# Altium PCB PCB1.PcbDoc
Units mm, origin at the board's own origin, x right, y up, seen from the top; angles counter-clockwise.
Board outline 50.04 x 50.04 mm, 2 copper layers (Top Layer, Bottom Layer); 20 components, 16 nets, 55 pads, 0 vias.
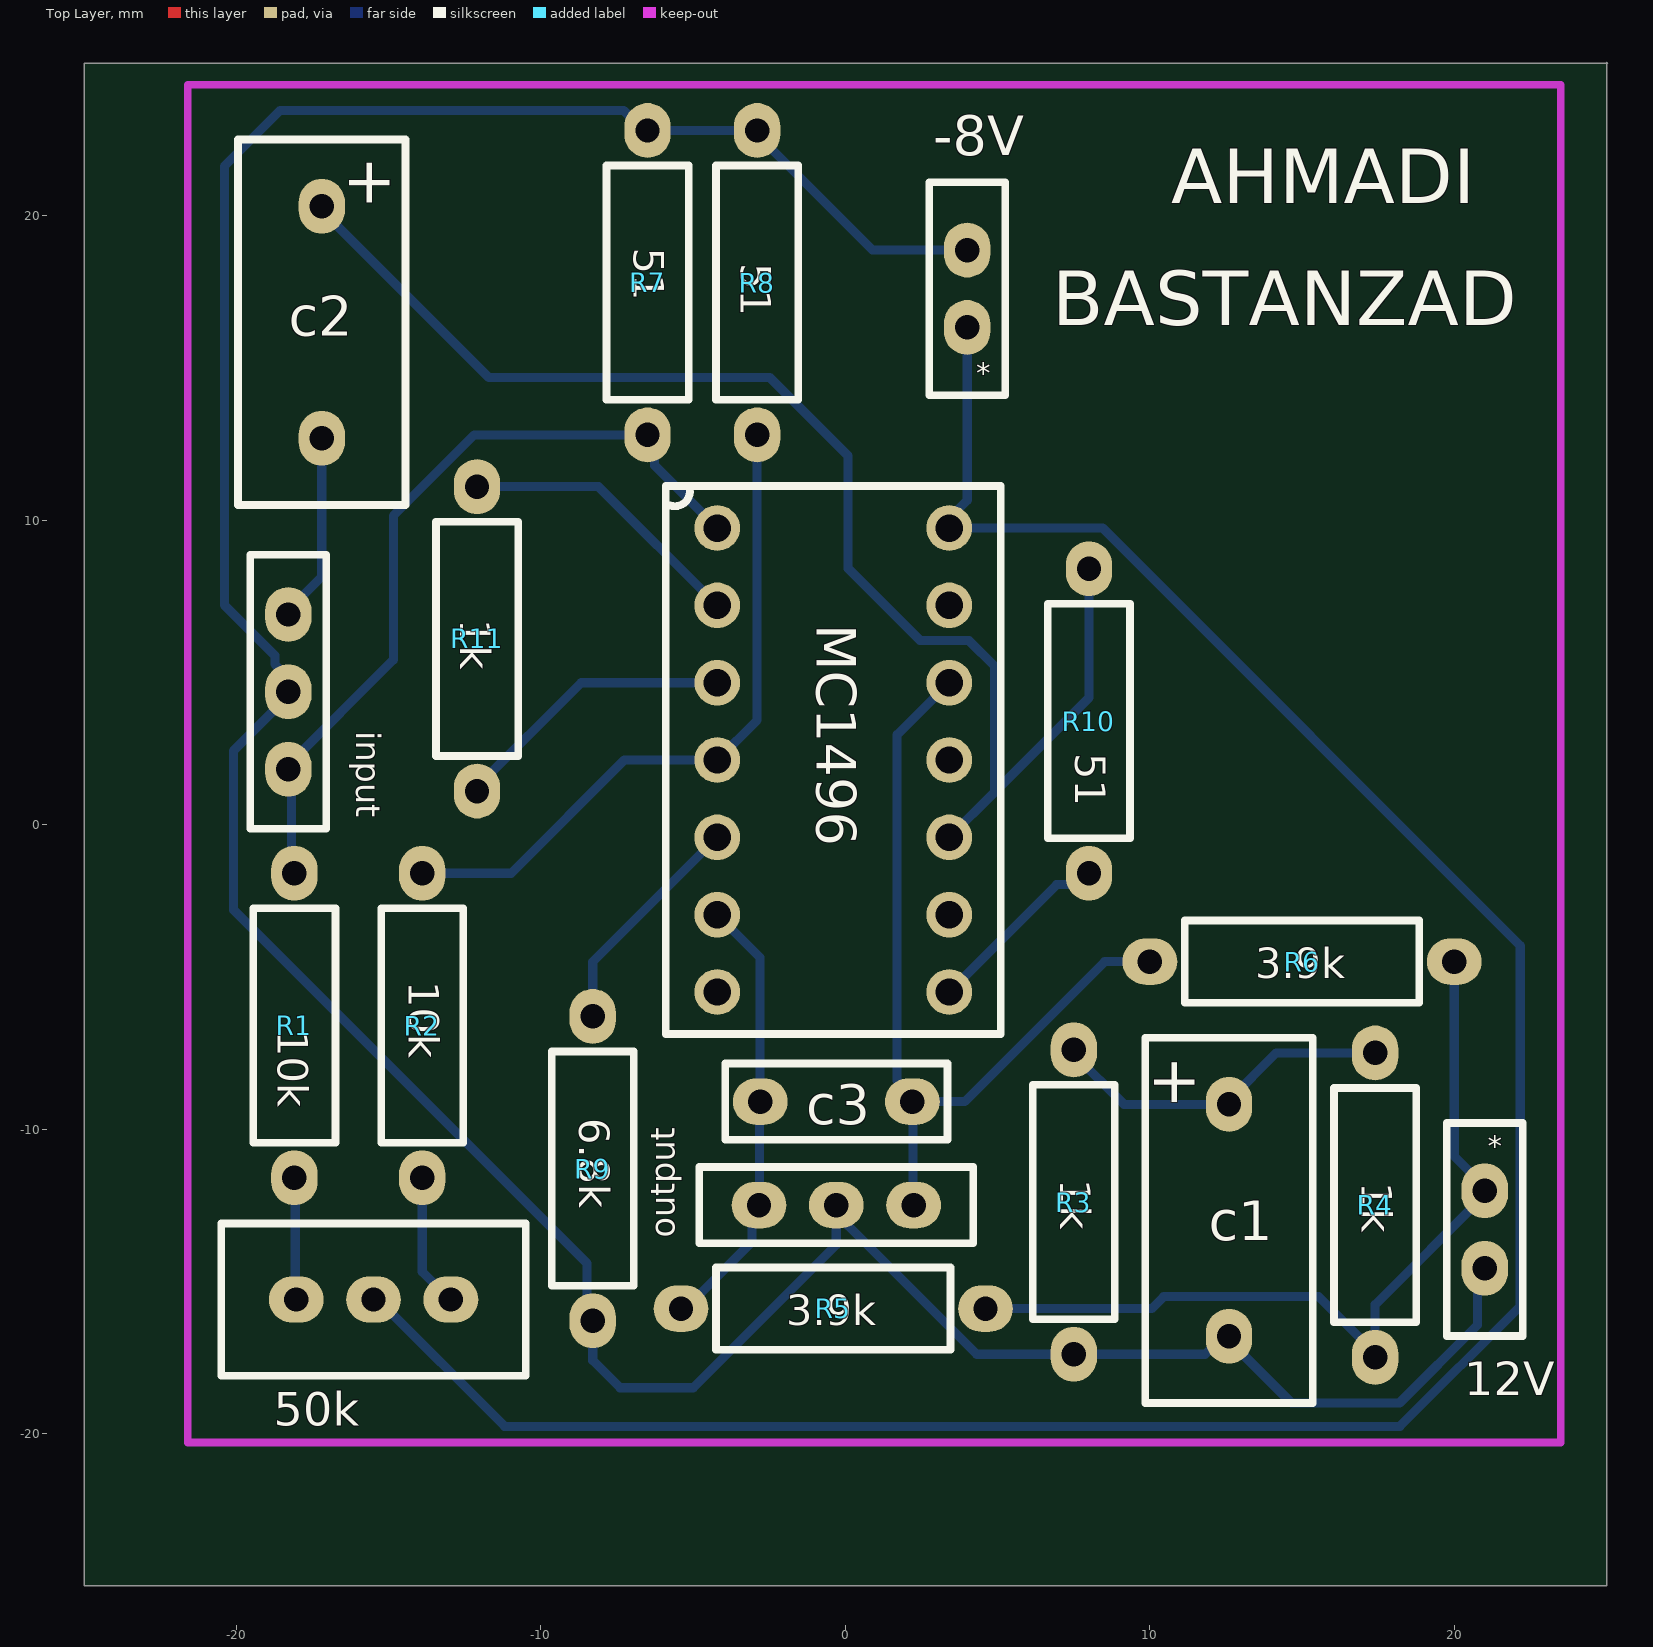
[diagram p0: Top Layer view]
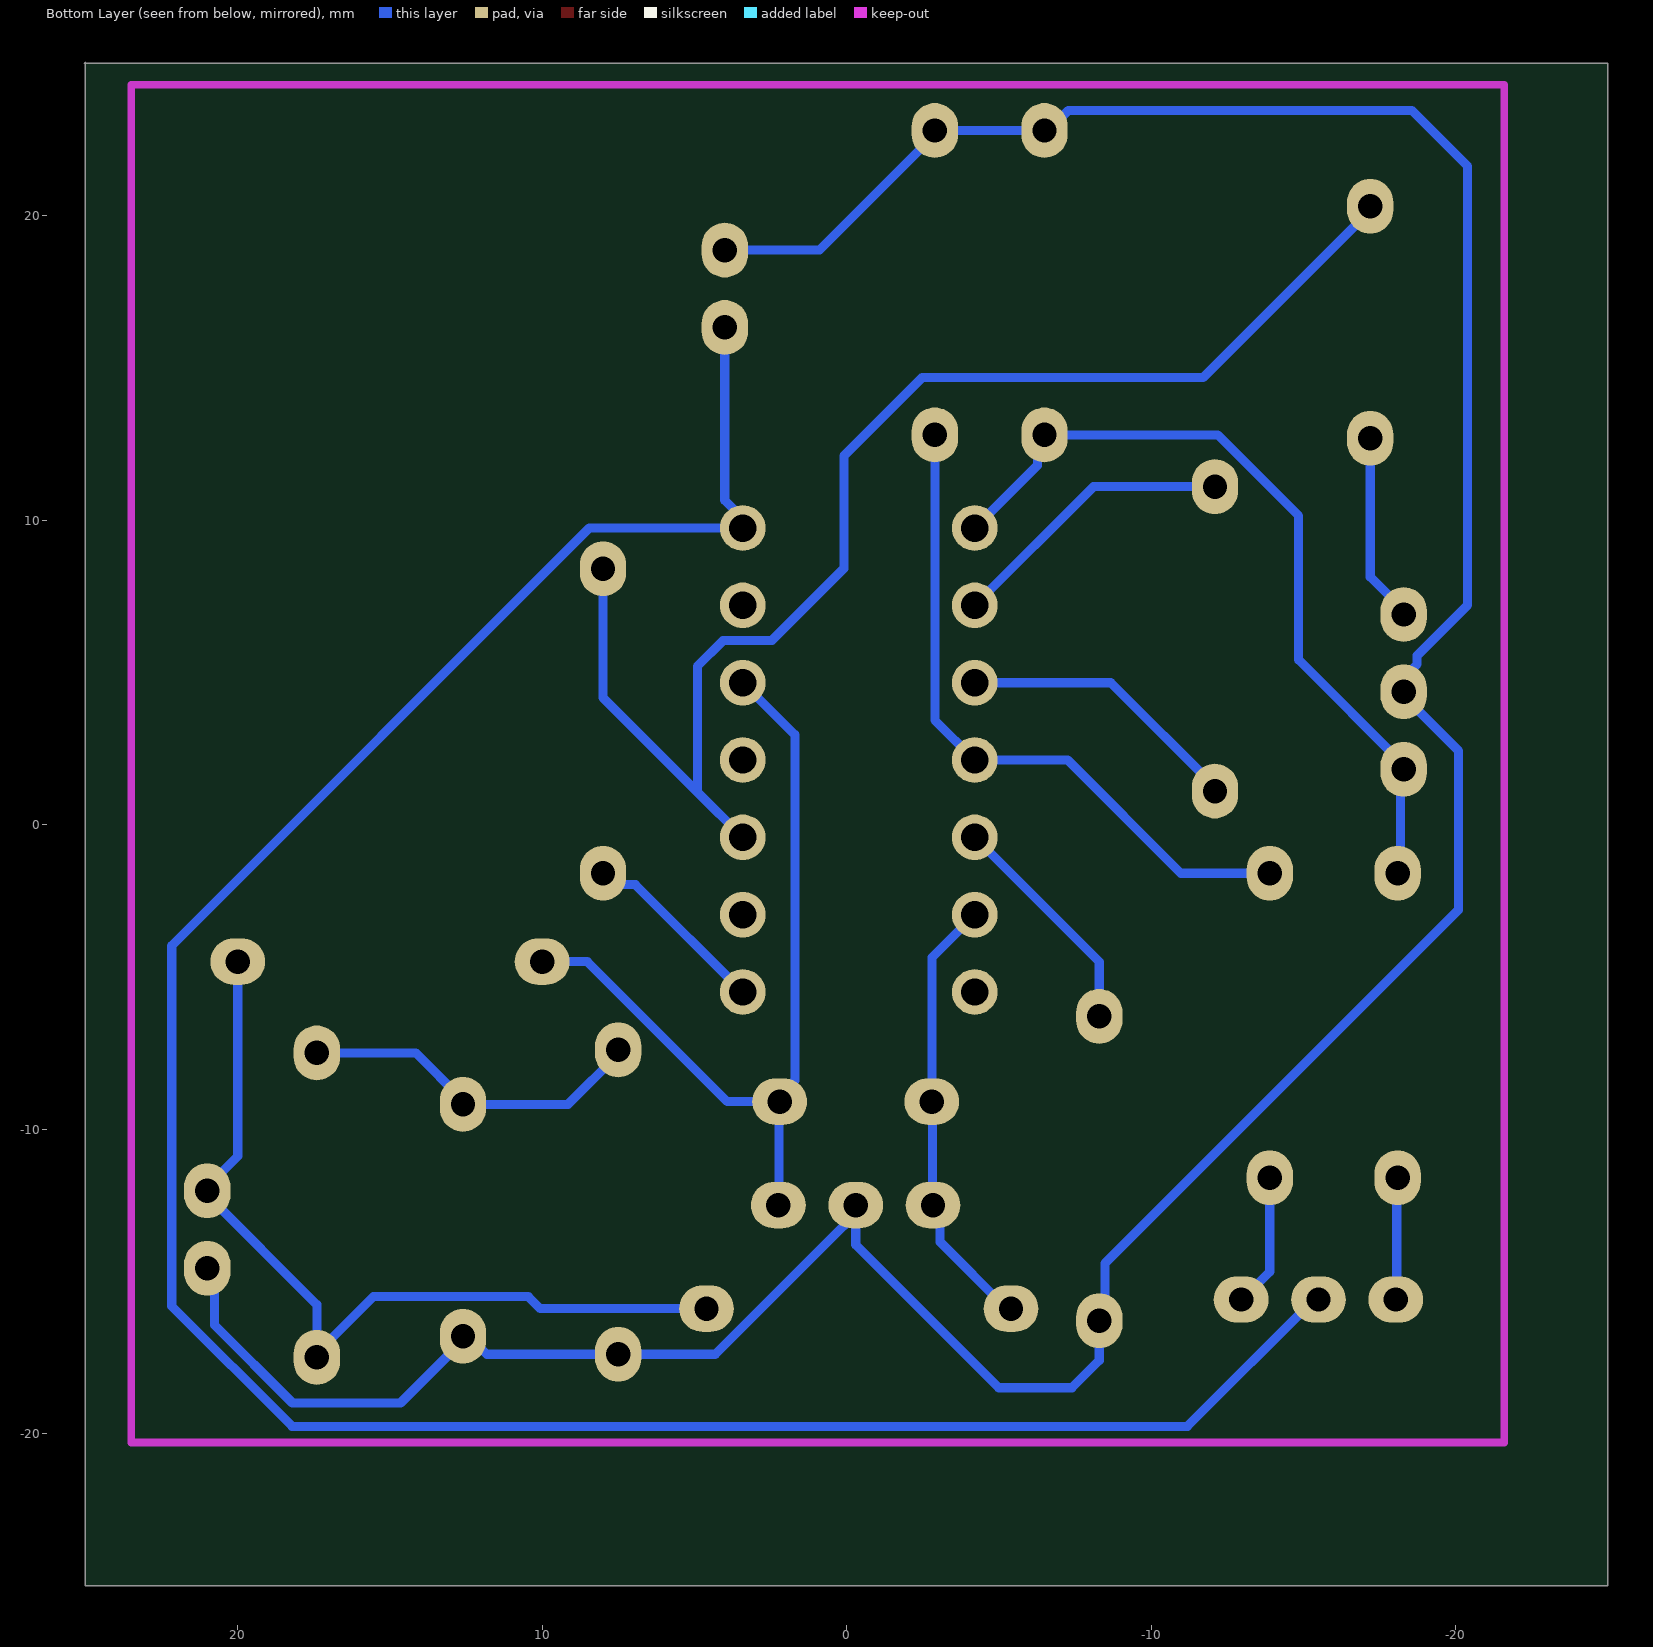
[diagram p1: Bottom Layer view, seen from below]

## Layer stack, top to bottom
Top Solder: solder mask 0.0102, Solder Resist, Dk 3.5
Top Layer: signal copper 0.0356
Dielectric 1: dielectric 0.32, FR-4, Dk 4.8
Bottom Layer: signal copper 0.0356
Bottom Solder: solder mask 0.0102, Solder Resist, Dk 3.5

## Board outline
-25,-25 -25,25 25.038,25 25,25.038 25,-25

## Design rules (kind name [scope] priority, off if disabled: settings)
Clearance [All] p1: gap=0.254 ignorepadtopadclearanceinfootprint=FALSE
PolygonConnect [All] p1: connectstyle=Relief reliefconductorwidth=0.254 reliefentries=4 polygonreliefangle="90 Angle" airgapwidth=0.254
RoutingVias [All] p1: holewidth=0.711 width=1.27 viastyle="Through Hole" minholewidth=0.711 minwidth=1.27 maxholewidth=0.711 maxwidth=1.27
SolderMaskExpansion [All] p1: expansion=0.102 istentingtop=FALSE
SupplyNets "Schematic Supply Nets" [InNet('GND')] p1: voltage=0.000
Width [All] p1: maxlimit=0.3 minlimit=0.254 preferedwidth=0.3 toplayer_maxwidth=0.254 toplayer_prefwidth=0.254 bottomlayer_minwidth=0.3 minimp=50.000000 maximp=50.000000 favimp=50.000000
30 further rules are at their usual default settings.

## Components (designator, comment, footprint, x,y, rotation, side; value= is the part's Value field where it differs from the comment)
12V "2x pin header" "2x pin header" 21,-13.3 r270 top
50k "3296 potenciometer" "3296 potenciometer" -15.5,-15.6 r0 top (schematic designator 50K)
-8V "2x pin header" "2x pin header" 4,17.6 r90 top
c1 "100n" "100n cap" 12.6,-13 r270 top
c2 "100n" "100n cap" -17.2,16.5 r270 top
c3 "100p" "100p capacitor" -0.3,-9.1 r180 top
input "3x pin header" "3x pin header" -18.3,4.36 r90 top
MC1496 "MC1496.PP" DIP-14-7.62mm -0.4,-5.5 r0 top (schematic designator U1)
output "3x pin header" "3x pin header" -0.3,-12.5 r0 top
R1 "10k" R_AXIAL_0.25W -18.1,-6.6 r270 top
R2 "10k" R_AXIAL_0.25W -13.9,-6.6 r270 top
R3 "1K" R_AXIAL_0.25W 7.5,-12.4 r90 top
R4 "1k" R_AXIAL_0.25W 17.4,-12.5 r270 top
R5 "3.9k" R_AXIAL_0.25W -0.4,-15.9 r0 top
R6 "3.9k" R_AXIAL_0.25W 15,-4.5 r0 top
R7 "51ohm" R_AXIAL_0.25W -6.5,17.8 r270 top
R8 "51ohm" R_AXIAL_0.25W -2.9,17.8 r270 top
R9 "6.8k" R_AXIAL_0.25W -8.3,-11.3 r90 top
R10 "51ohm" R_AXIAL_0.25W 8,3.4 r90 top
R11 "1k" R_AXIAL_0.25W -12.1,6.1 r270 top

## Footprints (in the part's own frame and the unit in brackets; to place one, negate y for a bottom-side part, rotate by r counter-clockwise, add the part's x,y. Pads: shape width x height; smd on the part's side, far side on the other; paste and mask are expansions set on the pad)
"2x pin header" [mm]
  oval 1.8x1.524 hole 0.8: 1(-1.27,0) 2(1.27,0)
  silkscreen extent -3.5,-1.25 3.5,1.25
"3x pin header" [mm]
  oval 1.8x1.524 hole 0.8: 1(-2.54,0) 2(0,0) 3(2.54,0)
  silkscreen extent -4.5,-1.25 4.5,1.25
"100n cap" [mm]
  oval 1.8x1.524 hole 0.8: 1(-3.81,0) 2(3.81,0)
  silkscreen extent -6,-2.75 6,2.75
"100p capacitor" [mm]
  oval 1.8x1.524 hole 0.8: 1(-2.5,0) 2(2.5,0)
  silkscreen extent -3.65,-1.25 3.65,1.25
"3296 potenciometer" [mm]
  oval 1.8x1.524 hole 0.8: 1(-2.54,0) 2(0,0) 3(2.54,0)
  silkscreen extent -5,-2.5 5,2.5
DIP-14-7.62mm [mm]
  round 1.5 hole 0.9: 1(-3.81,15.24) 2(-3.81,12.7) 3(-3.81,10.16) 4(-3.81,7.62) 5(-3.81,5.08) 6(-3.81,2.54) 7(-3.81,0) 8(3.81,0) 9(3.81,2.54) 10(3.81,5.08) 11(3.81,7.62) 12(3.81,10.16) 13(3.81,12.7) 14(3.81,15.24)
  silkscreen extent -5.5,-1.38 5.5,16.62
R_AXIAL_0.25W [mm]
  oval 1.8x1.524 hole 0.8: 1(-5,0) 2(5,0)
  silkscreen extent -3.85,-1.35 3.85,1.35

## Part data
c1 c2: library part "100n capacitor"
c3: library part "100p capacitor"
MC1496: library part MC1496.Dipp
R1 R2 R3 R4 R5 R6 R7 R8 R9 R10 R11: library part RESISTOR_Dipp

## Nets (pads, with @x,y where several pads share a name; then routed paths per layer and width w, separated by ;. In a path a pad name is that pad's centre, name@x,y a point inside that pad or via, vN(x,y) a via of type N, cw(c..) or ccw(c..) an arc to the next point about the centre after c; other vN are vias at no path point)
bias: MC1496.5 R9.2 | length 7.6
  Bottom Layer w0.3: R9.2 -8.3,-4.51 MC1496.5
carr-in: MC1496.8 R10.1 | length 6.2
  Bottom Layer w0.3: MC1496.8 6.938,-1.972 7.628,-1.972 R10.1
carr-ref: c2.1 MC1496.10 R10.2 | length 45.5
  Bottom Layer w0.3: c2.1 -17.2,20.172 -11.712,14.684 -2.484,14.684 0.083,12.117 0.083,8.417 2.454,6.046 4.054,6.046 4.9,5.2 4.9,1.07 ; MC1496.10 4.9,1.07 ; R10.2 8,4.17 4.9,1.07
ga1: MC1496.2 R11.1 | length 9.5
  Bottom Layer w0.3: R11.1 -8.11,11.1 MC1496.2
ga2: MC1496.3 R11.2 | length 9.4
  Bottom Layer w0.3: R11.2 -12.1,1.238 -8.678,4.66 MC1496.3
GND: 12V.2 -8V.2 c1.2 input.2 output.2 R3.1 R7.1 R8.1 R9.1 | length 111.7
  Bottom Layer w0.3: R9.1@-8.483,-16.117 -8.483,-14.417 -20.1,-2.8 -20.1,2.422 -18.3,4.222 -18.3,4.829 -18.742,5.271 -18.742,5.555 -20.4,7.213 -20.4,21.624 -18.566,23.458 -7.288,23.458 -6.629,22.8 R8.1 -2.9,22.662 0.892,18.87 -8V.2 ; R9.1 -8.3,-17.6 -7.4,-18.5 -5,-18.5 -0.3,-13.8 output.2 0.072,-12.872 0.072,-13.159 4.313,-17.4 R3.1 11.817,-17.4 12.407,-16.81 c1.2 12.6,-16.948 14.652,-19 18.2,-19 20.767,-16.433 20.767,-14.803 12V.2
in-a: input.1 MC1496.1 R1.1 R7.2 | length 26.7
  Bottom Layer w0.3: R1.1 -18.2,-1.5 -18.2,1.72 input.1 -18.3,1.958 -14.846,5.412 -14.846,10.141 -12.187,12.8 R7.2 -6.266,12.566 -6.266,11.796 MC1496.1
in-b: MC1496.4 R2.1 R8.2 | length 22.5
  Bottom Layer w0.3: R2.1 -10.981,-1.6 -7.261,2.12 MC1496.4 -2.9,3.43 R8.2
Net12V_1: 12V.1 R4.2 R5.2 R6.2 | length 28.8
  Bottom Layer w0.3: R5.2 10.061,-15.9 10.455,-15.506 15.544,-15.506 17.4,-17.362 R4.2 17.4,-15.768 21,-12.168 12V.1 21,-11.892 20,-10.892 R6.2
Net50k_1: 50k.1 R1.2 | length 4
  Bottom Layer w0.3: R1.2 -18.07,-11.63 -18.07,-15.57 50k.1
Net50k_3: 50k.3 R2.2 | length 4.4
  Bottom Layer w0.3: R2.2 -13.9,-14.688 -12.988,-15.6 50k.3
Netc1_1: c1.1 R3.2 R4.1 | length 11.5
  Bottom Layer w0.3: R3.2 7.5,-7.538 9.152,-9.19 c1.1 12.6,-9.052 14.152,-7.5 R4.1
Netc2_2: c2.2 input.3 | length 6.2
  Bottom Layer w0.3: input.3 -18.3,7.038 -17.2,8.138 c2.2
out1: c3.2 MC1496.6 output.1 R5.1 | length 14.7
  Bottom Layer w0.3: R5.1 -5.262,-15.9 -3.074,-13.712 -3.074,-12.734 output.1 -2.82,-12.48 -2.82,-9.12 c3.2 -2.8,-4.37 MC1496.6
out2: c3.1 MC1496.12 output.3 R6.1 | length 27.8
  Bottom Layer w0.3: output.3 2.22,-12.48 2.22,-9.12 c3.1 ; MC1496.12 1.7,2.95 1.7,-8.407 2.2,-8.907 c3.1 ; R6.1 8.517,-4.5 3.917,-9.1 c3.1
vee: 50k.2 -8V.1 MC1496.14 | length 84.1
  Bottom Layer w0.3: 50k.2 -15.362,-15.6 -11.193,-19.769 18.214,-19.769 22.166,-15.817 22.166,-3.979 8.447,9.74 MC1496.14 3.41,10.065 4,10.655 -8V.1
pads on no net: MC1496.7 MC1496.9 MC1496.11 MC1496.13

## Keep-outs
Keep-Out Layer:
  lines w0.254: -21.6,-20.3 23.5,-20.3 23.5,24.3 -21.6,24.3 -21.6,-20.3

## Silkscreen, mask and mechanical layers (free items; w line width, h text height)
Top Overlay:
  text "AHMADI" at 10.7,20.401 h1.8
  text "51" at -6.946,18.946 h1 r270
  text "51" at -3.446,18.446 h1 r270
  text "BASTANZAD" at 6.8,16.4 h1.8
  text "*" at 4.3,14.483 h0.7
  text "1k" at -12.646,6.746 h1 r270
  text "51" at 7.554,2.346 h1 r270
  text "3.9k" at 13.454,-5.046 h1
  text "10k" at -14.346,-5.154 h1 r270
  text "10k" at -18.646,-6.754 h1 r270
  text "6.8k" at -8.746,-9.654 h1 r270
  text "*" at 21.1,-10.917 h0.7
  text "1k" at 7.054,-11.654 h1 r270
  text "1k" at 16.954,-11.754 h1 r270
  text "3.9k" at -1.946,-16.446 h1

## Text inside footprints (layer, text, board x,y; h text height)
c1: Top Overlay "+" at 10.146,-7.6 h1.52 r270
c2: Top Overlay "+" at -16.304,21.95 h1.52 r270